# EAGLE board Control Board (EAGLE 6.2)
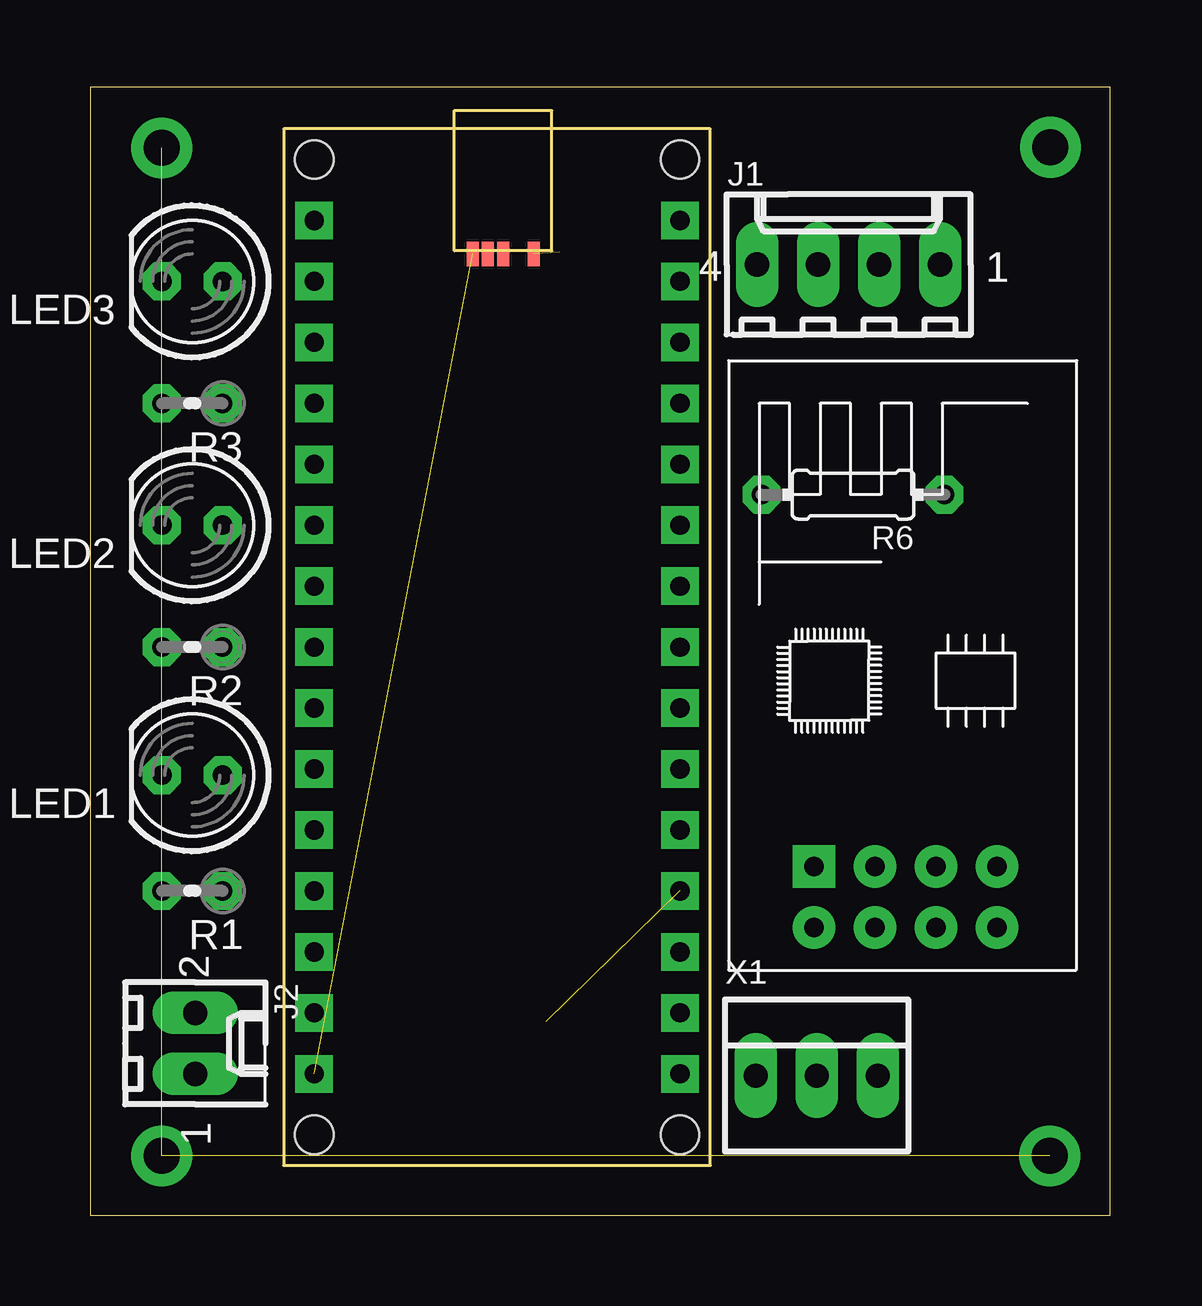
[diagram p0: board, top side]
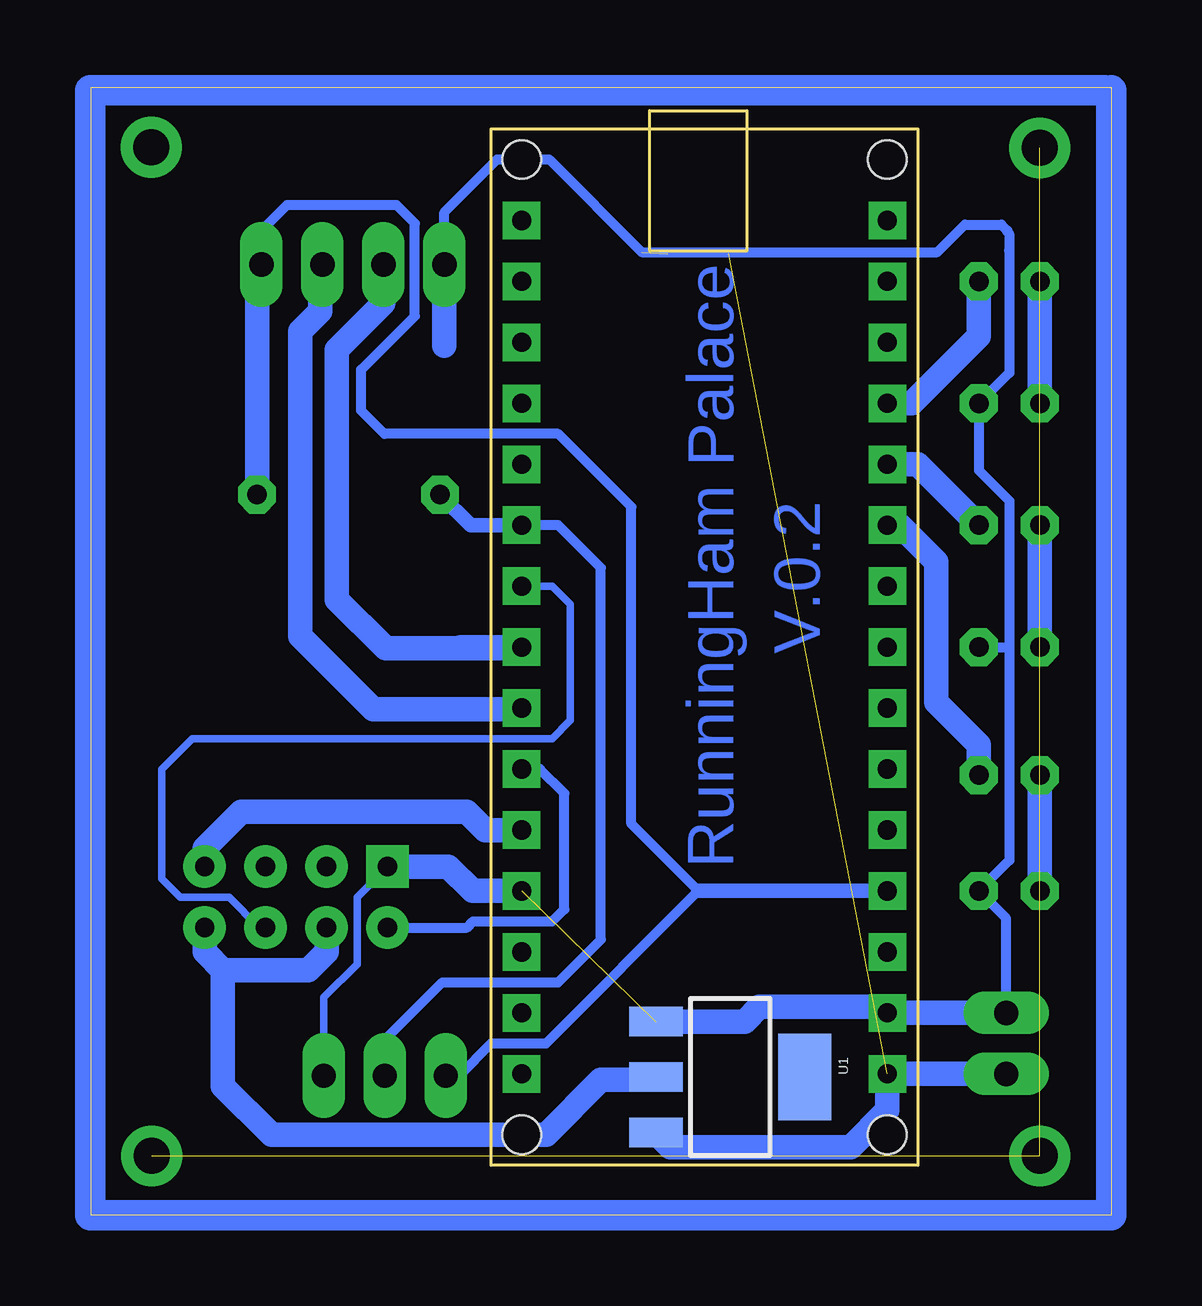
[diagram p1: board, bottom side, seen from below]

Size 42.5 x 47 mm. Coordinates in mm from the lower left corner, seen from the top.
Outline: 0,0 42.5,0 42.5,47 0,47 0,0
Copper layers (1*16): Top 0.035mm / dielectric 1.5mm / Bottom 0.035mm
Design rules: minimum track width 10mil, minimum drill 24mil, track to track 8mil, track to pad 8mil, pad to pad 8mil, via to via 8mil, smd to smd 8mil, copper to edge 40mil, drill to drill 8mil, minimum pad ring 15mil, minimum via ring 8mil, stop-mask expansion 4mil, vias tented up to drill 0mil, thermal gap 10mil

## Footprints (pad centres in the part's own frame; a part is rotated, then mirrored left to right if it is on the bottom)
6410-04 = drill 1.016 long: 1 3.81,0; 2 1.27,0; 3 -1.27,0; 4 -3.81,0
6410-02 = drill 1.016 long: 1 1.27,0; 2 -1.27,0
LED5MM = drill 0.813 octagon: A -1.27,0; K 1.27,0
0204V = drill 0.813 octagon: 1 -1.27,0; 2 1.27,0
0204/7 = drill 0.813 octagon: 1 -3.81,0; 2 3.81,0
SOT223 = smd 1.219 x 2.235: 1 -2.311,-3.099; 2 0,-3.099; 3 2.311,-3.099 | smd 3.6 x 2.2: 4 0,3.099
ARDUINO_NANO_V3 = drill 0.8 square: 3.3V 15.24,-33.02; 5V 15.24,-7.62; A0 15.24,-27.94; A1 15.24,-25.4; A2 15.24,-22.86; A3 15.24,-20.32; A4 15.24,-17.78; A5 15.24,-15.24; A6 15.24,-12.7; A7 15.24,-10.16; D2 0,-10.16; D3 0,-12.7; D4 0,-15.24; D5 0,-17.78; D6 0,-20.32; D7 0,-22.86; D8 0,-25.4; D9 0,-27.94; D10 0,-30.48; D11 0,-33.02; D12 0,-35.56; D13 15.24,-35.56; GND 0,-7.62; GND1 15.24,-2.54; REF 15.24,-30.48; RESET 0,-5.08; RESET1 15.24,-5.08; RXO 0,-2.54; TXI 0,0; VIN 15.24,0 | smd 0.508 x 1.016: D+ 7.366,-34.163; D- 8.001,-34.163; GND_USB 6.096,-34.163; VUSB 8.636,-34.163 | hole 1.6: 0,2.54; 15.24,2.54; 15.24,-38.1; 0,-38.1
ESP8266 = drill 0.8 pad 1.778: CH_PD 21.59,2.54; GPIO0 19.05,5.08; GPIO2 19.05,2.54; RST 21.59,5.08; RX 19.05,7.62; TX 21.59,0; VCC 21.59,7.62 | drill 0.8 pad 1.778 square: GND 19.05,0
22-23-2031 = drill 1 long: 1 -2.54,0; 2 0,0; 3 2.54,0

## Placement (x,y rotation side)
J1  22-27-2041-04  [6410-04]  31.59,39.61 0 top
J2  22-27-2021-02  [6410-02]  4.37,7.16 270 top
LED1  [LED5MM]  4.24,18.34 180 top
LED2  [LED5MM]  4.24,28.75 180 top
LED3  [LED5MM]  4.24,38.91 180 top
R1  [0204V]  4.24,13.51 180 top
R2  [0204V]  4.24,23.67 180 top
R3  [0204V]  4.24,33.83 180 top
R6  10K  [0204/7]  31.77,30.02 180 top
U1  V_REG_317SMD  [SOT223]  15.86,5.76 270 bottom
U$1  ARDUINO_NANO_V3  [ARDUINO_NANO_V3]  24.56,5.89 180 top
U$2  ESP8266  [ESP8266]  30.15,33.58 270 top
X1  22-23-2031  [22-23-2031]  30.25,5.82 0 top

## Library data of the parts
J1 J2 = con-molex; OC_FARNELL: unknown; OC_NEWARK: unknown
LED1-LED3 = led
R1-R3 = rcl
R6 = resistor
U1 = SparkFun-PowerIC
U$1 U$2 = MimaZ
X1 = con-molex; MF: MOLEX; MPN: 22-23-2031; OC_FARNELL: 1462950; OC_NEWARK: 30C0862

## Nets
+3V3: U1.2 U$2.CH_PD U$2.VCC
+5V: J1.1 R6.1 U$1.5V X1.1
+12V: J2.1 U1.3 U$1.VIN U$1.VUSB
GND: J1.4 J2.2 R1.1 R2.1 R3.1 U1.1 U$1.GND U$1.GND1 U$1.GND_USB U$2.GND X1.3
HALL_OUT: R6.2 U$1.D7 X1.2
N$1: LED1.A U$1.A2
N$2: U$1.D3 U$2.TX
N$3: U$1.D2 U$2.RX
N$4: LED2.A U$1.A1
N$5: LED3.A U$1.A0
N$6: LED1.K R1.2
N$7: LED2.K R2.2
N$8: LED3.K R3.2
N$10: U$1.D6 U$2.RST
SCL: J1.3 U$1.D5
SDA: J1.2 U$1.D4

## Tracks (layer width: path | path; a pad name or v marks a point on that pad's centre or on a via)
+3V3
  Bottom 1.016: U$2.CH_PD 32.69,10.97 33.45,10.21 37.01,10.21 | 37.01,10.21 37.77,10.97 U$2.VCC | 37.01,10.21 37.01,5.38 34.97,3.35 23.54,3.35 21.26,5.64 20.1,5.64 U1.2
+5V
  Bottom 0.406: X1.1 27.17,5.82 25.83,7.16 23.54,7.16 17.19,13.51 19.99,16.3 19.99,29.51 23.04,32.56 30.27,32.56 31.24,33.53 31.24,35.23 29.01,37.47 29.01,41.32 29,41.32 29.77,42.09 34.34,42.09 35.4,41.02 J1.1
  Bottom 0.61: 17.19,13.51 U$1.5V
  Bottom 1.016: R6.1 35.58,39.43 J1.1 35.4,38.86
+12V  (1 unrouted)
  Bottom 1.016: J2.1 U$1.VIN 9.32,4.37 10.84,2.84 18.36,2.84 U1.3
GND  (2 unrouted)
  Bottom 0.305: X1.3 32.8,9.09 31.42,10.46 31.42,13.26 U$2.GND
  Bottom 0.406: 4.24,23.67 4.24,29.77 5.51,31.04 R3.1 4.24,35.1 4.24,40.18 4.25,40.19 4.25,40.9 4.32,40.97 4.32,41.02 4.57,41.27 6.1,41.27 7.24,40.13 19.56,40.13 23.42,43.99 25.58,43.99 27.78,41.79 J1.4 | 4.24,23.67 4.24,14.78 R1.1 4.37,12.37 J2.2 | R2.1 4.24,23.67
  Bottom 1.016: J2.2 U$1.GND1 9.57,8.68 14.65,8.68 15.27,8.07 U1.1 | U$2.GND 27.61,14.53 26.59,13.51 U$1.GND | 27.78,36.23 J1.4
HALL_OUT
  Bottom 0.406: X1.2 30.25,7.31 27.86,9.7 23.04,9.7 21.26,11.48 21.26,26.97 23.04,28.75 U$1.D7
  Bottom 0.61: R6.2 26.69,28.75 U$1.D7
N$1
  Bottom 1.016: LED1.A 5.51,19.61 7.29,21.38 7.29,27.23 8.81,28.75 U$1.A2
N$2
  Bottom 0.406: U$2.TX 26.85,11.99 26.59,12.24 23.29,12.24 22.78,12.75 22.78,17.57 23.8,18.59 U$1.D3
N$3
  Bottom 1.016: U$2.RX 37.77,15.29 36.24,16.81 26.85,16.81 26.08,16.05 U$1.D2
N$4
  Bottom 1.016: U$1.A1 8.05,31.29 LED2.A
N$5
  Bottom 1.016: U$1.A0 8.3,33.83 5.51,36.62 LED3.A
N$6
  Bottom 1.016: LED1.K R1.2
N$7
  Bottom 1.016: R2.2 LED2.K
N$8
  Bottom 1.016: R3.2 LED3.K
N$10
  Bottom 0.305: 35.48,11.99 36.75,13.26 38.78,13.26 39.55,14.02 39.55,18.59 38.28,19.86 23.29,19.86 22.53,20.62 22.53,25.45 23.29,26.21 U$1.D6
  Bottom 0.406: U$2.RST 35.48,11.99
N$13
  Bottom 1.27: 0.25,46.86 42.52,46.86 42.52,0
N$14  (via drill 1.5 pad 2.54)  (2 unrouted)
  other vias: 2.98,44.47 2.98,2.47 39.98,2.47
N$15  (via drill 1.5 pad 2.54)
  other vias: 40,44.5
N$18
  Bottom 1.27: 0,46.86 0,0 15.1,0
N$19
  Bottom 1.27: 13.8,0 42.5,0
SCL
  Bottom 1.016: 27.1,23.67 25.15,23.67 | 25.15,23.67 U$1.D5 | J1.3 30.32,38.01 32.26,36.07 32.26,25.65 30.23,23.62 25.19,23.62 25.15,23.67
SDA
  Bottom 1.016: J1.2 32.94,39.53 32.94,37.67 33.78,36.83 33.78,24.13 30.73,21.08 24.61,21.08 U$1.D4

## Text on the board
Bottom: RunningHam Palace | V.0.2